# Altium PCB PIC0_D4_SD_card_T3.PcbDoc (part 2 of 2)
Units mm, origin at the board's own origin, x right, y up, seen from the top; angles counter-clockwise.
Board outline 20 x 34 mm, 2 copper layers (Top Layer, Bottom Layer), stack 1.671 mm thick; 52 components, 65 nets, 236 pads, 240 vias.
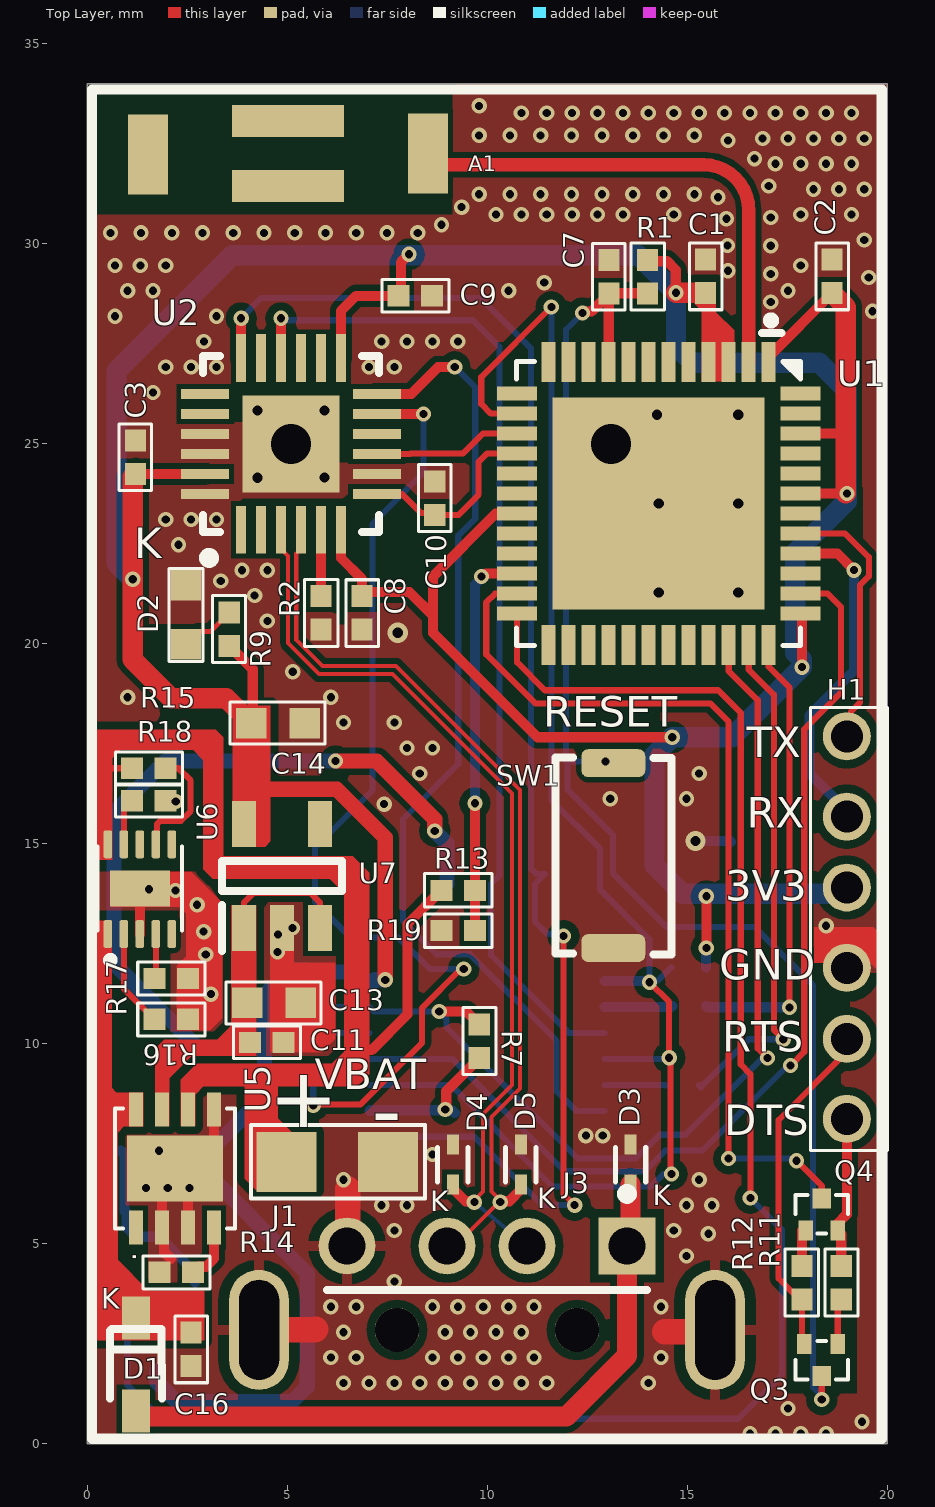
[diagram p0: Top Layer view]

## Via types
v1: diameter 0.381, hole 0.203, Top Layer to Bottom Layer, tented both sides, 227 vias
v2: diameter 0.508, hole 0.254, Top Layer to Bottom Layer, tented both sides, 12 vias
v3: diameter 0.381, hole 0.203, Top Layer to Bottom Layer, 1 vias

## Nets (pads, with @x,y where several pads share a name; then routed paths per layer and width w, separated by ;. In a path a pad name is that pad's centre, name@x,y a point inside that pad or via, vN(x,y) a via of type N, cw(c..) or ccw(c..) an arc to the next point about the centre after c; other vN are vias at no path point) (continued)
GND: (continued)
  Top Layer w0.635: J3.5 5.708,2.85 5.726,2.868 ; J3.4 6.521,4.971 6.521,6.379 ; 14.436,2.802 15.652,2.802 J3.6
  Bottom Layer w0.254: v2(15.212,15.075) 16.059,15.075 16.075,15.06 16.082,15.066 J2.6@16.1,15.048
  Bottom Layer w0.762: 5.069,24.968 5.1,24.999
  other v1: 16.574,0.253 17.209,0.253 17.844,0.253 18.479,0.253 19.374,0.554 17.527,0.888 6.414,1.523 7.049,1.523 7.684,1.523 8.319,1.523 8.954,1.523 9.589,1.523 10.224,1.523 10.859,1.523 11.494,1.523 14.034,1.523 6.097,2.158 6.732,2.158 8.637,2.158 9.272,2.158 9.907,2.158 10.542,2.158 11.177,2.158 14.352,2.158 6.414,2.793 8.954,2.793 9.589,2.793 10.224,2.793 10.859,2.793 6.097,3.428 6.732,3.428 8.637,3.428 9.272,3.428 9.907,3.428 10.542,3.428 11.177,3.428 14.352,3.428 7.684,4.063 14.987,4.698 15.534,5.255 7.684,5.333 14.669,5.333 7.367,5.968 8.002,5.968 14.987,5.968 15.622,5.968 1.473,6.401 2.019,6.401 2.565,6.401 6.414,6.603 15.304,6.603 8.637,7.238 1.8,7.33 12.471,7.707 12.894,7.707 3.096,11.245 2.969,12.233 4.765,12.301 4.778,12.738 2.916,12.807 5.133,12.898 18.479,12.953 2.753,13.48 2.215,13.835 1.554,13.866 7.428,15.994 13.082,16.128 14.987,16.128 8.319,16.763 15.304,16.763 8.002,17.398 8.637,17.398 6.414,18.033 7.684,18.033 1.017,18.668 6.097,18.668 5.144,19.303 4.509,20.573 4.192,21.208 3.344,21.572 3.874,21.843 4.509,21.843 2.287,22.478 1.969,23.113 2.604,23.113 3.239,23.113 1.652,26.288 1.969,26.923 2.604,26.923 3.239,26.923 7.049,26.923 7.684,26.923 2.922,27.558 7.367,27.558 8.002,27.558 8.637,27.558 9.272,27.558 0.699,28.193 3.239,28.193 19.637,28.316 17.094,28.55 1.017,28.828 1.652,28.828 10.542,28.828 17.527,28.828 11.43,29.032 19.543,29.159 17.094,29.252 16.024,29.329 0.699,29.463 1.334,29.463 1.969,29.463 17.844,29.463 17.094,29.955 16.015,29.964 19.432,30.098 0.584,30.277 1.353,30.277 2.121,30.277 2.889,30.277 3.658,30.277 4.426,30.277 5.194,30.277 5.963,30.277 6.731,30.277 7.499,30.277 8.268,30.277 8.865,30.48 15.983,30.63 17.094,30.658 10.224,30.733 10.859,30.733 11.494,30.733 12.129,30.733 12.764,30.733 13.399,30.733 14.669,30.733 17.844,30.733 19.114,30.733 9.366,30.919 15.773,31.166 9.804,31.242 10.573,31.242 11.341,31.242 12.109,31.242 12.878,31.242 13.646,31.242 14.414,31.242 15.183,31.242 18.162,31.368 18.797,31.368 19.432,31.368 17.043,31.445 17.209,32.003 17.844,32.003 18.479,32.003 19.114,32.003 16.688,32.131 16.027,32.588 16.892,32.638 17.527,32.638 18.162,32.638 18.797,32.638 19.432,32.638 9.804,32.715 10.573,32.715 11.341,32.715 12.109,32.715 12.878,32.715 13.646,32.715 14.414,32.715 15.183,32.715 10.859,33.273 11.494,33.273 12.129,33.273 12.764,33.273 13.399,33.273 14.034,33.273 14.669,33.273 15.304,33.273 15.939,33.273 16.574,33.273 17.209,33.273 17.844,33.273 18.479,33.273 19.114,33.273 9.804,33.452
  other v2: 7.769,20.279 14.293,21.288 16.281,21.288 14.293,23.509 16.281,23.509 4.262,24.155 5.938,24.161 14.249,25.73 16.281,25.73 4.262,25.837 5.938,25.837
IO12: U1.18
IO13: U1.20
IO14: U1.17
IO15: U1.21
IO21: U1.42
IO22: U1.39
IO32: U1.12
IO33: U1.13
IO34: U1.10
IO35: U1.11
IO37: U1.6
IO38: U1.7
LNA_IN: A1.1 U1.2 | length 12.6
  Top Layer w0.33: A1.1 ccw(c8.809,32.258) 8.809,31.979 15.418,31.979 cw(c15.418,30.854) 16.543,30.854 U1.2
NetD1_2: D1.2 D3.1 J3.1 | length 17.2
  Top Layer w0.508: D1.2@1.225,0.683 11.979,0.683 13.5,2.205 J3.1 13.589,5.039 D3.1
NetD2_1: D2.1 R9.2 | length 1.4
  Top Layer w0.127: D2.1 2.786,20.315 3.091,20.315 3.556,20.78 R9.2
NetQ2_2: Q2.2 R10.1 U4.3 | length 4.4
  Bottom Layer w0.254: U4.3 0.935,7.245 0.935,5.827 0.968,5.794 R10.1 0.988,5.794 0.988,5.412 1.221,5.179 1.805,5.179 2.524,4.46 2.697,4.287 Q2.2
NetQ3_1: Q3.1 R11.2 | length 1.2
  Top Layer w0.152: Q3.1 R11.2@18.768,3.616
  Top Layer w0.254: R11.2@18.768,3.616 R11.2
NetQ4_1: Q4.1 R12.2 | length 1
  Top Layer w0.254: R12.2 17.872,5.34 Q4.1
NetR2_1: R2.1 U2.5 | length 1.7
  Top Layer w0.254: R2.1 U2.5
NetR4_1: R4.1 U3.2 | length 1.7
  Bottom Layer w0.254: U3.2 14.615,10.927 R4.1
NetR5_2: R5.2 U3.12 | length 1.6
  Bottom Layer w0.152: R5.2 5.647,10.277 U3.12
NetR6_1: R6.1 U3.5 | length 1.5
  Bottom Layer w0.152: U3.5 14.447,8.977 R6.1
NetR7_2: R7.2 U3.9 | length 3.8
  Top Layer w0.254: v1(8.958,8.359) 8.982,8.383 8.982,8.82 9.804,9.642 R7.2
  Bottom Layer w0.254: U3.9 7.078,8.343 8.915,8.343 8.958,8.3 8.992,8.335 9.13,8.335 9.195,8.27
NetR14_1: R14.1 U5.4 | length 1.4
  Top Layer w0.254: R14.1 2.792,4.431 2.973,4.431 3.174,4.632 U5.4
NetR15_1: R15.1 U6.7 | length 3
  Top Layer w0.152: U6.7@1.721,14.977 1.755,15.01 1.755,15.499 1.832,15.576 2.346,15.576 2.588,15.818 2.588,16.59 2.287,16.891 R15.1
NetR16_2: R16.2 U6.2 | length 2.4
  Top Layer w0.152: U6.2@0.921,12.735 0.921,11.376 1.679,10.617 R16.2
NetR17_1: R17.1 U6.4 | length 1.1
  Top Layer w0.152: R17.1 1.721,11.665 U6.4@1.721,12.735
NetR18_1: R18.1 U6.9 | length 1.2
  Top Layer w0.152: U6.9@0.921,14.977 0.921,15.879 1.12,16.078 R18.1
OUT: C11.2 C13.1 U5.7 U7.1 U7.3 | length 3.4
  Top Layer w0.152: U7.1 3.927,13.538 4.158,13.769 5.588,13.769 5.827,13.531 U7.3
  Top Layer w0.254: 3.988,11.963 4.026,11.925
RTS: H1.2 Q3.2 R12.1 | length 8.7
  Top Layer w0.152: Q3.2 17.872,2.501 R12.1 17.811,3.616 17.291,4.136 17.291,8.098 18.996,9.804 H1.2
RX: U1.28
RXD0: H1.5 U1.40 | length 8.7
  Top Layer w0.254: U1.40 18.762,22.259 v1(19.177,21.844)
  Bottom Layer w0.254: H1.5@19.013,15.534 19.013,15.815 18.059,16.769 18.059,18.212 19.177,19.329 v1(19.177,21.844)
SD_CDZ: U1.15 U2.9 | length 3.7
  Top Layer w0.152: U2.9 8.087,24.749 ; 8.087,24.756 9.393,24.756 9.897,25.259 U1.15
SD_Power: Q2.1 U1.24 | length 44.1
  Top Layer w0.152: U1.24 10.753,19.539 11.449,18.842 15.778,18.842 16.344,18.276 16.344,9.487 16.583,9.247 v1(16.583,6.148)
  Bottom Layer w0.152: Q2.1 0.797,3.787 1.005,3.578 1.005,1.477 1.852,0.63 16.281,0.63 17.372,1.721 17.372,5.359 v1(16.583,6.148)
SD_Reset: C10.2 U1.16 U2.7 | length 4.8
  Top Layer w0.152: U2.7 7.874,23.749 8.352,23.271 C10.2@8.695,23.271 ; C10.2 9.283,23.222 9.792,23.731 9.792,24.552 9.999,24.759 U1.16
SD_VDD33: C4.1 J2.4 U4.5 | length 17.6
  Top Layer w0.381: v1(6.21,17.071) 7.242,17.071 8.692,15.621 v1(8.692,15.323)
  Bottom Layer w0.381: U4.5 0.672,12.007 0.672,15.786 1.957,17.071 v1(6.21,17.071) ; v1(8.692,15.323) 9,15.016 J2.4
Select: R8.2 U1.14 U3.1 U3.4 U3.10 | length 39.2
  Top Layer w0.152: U1.14 10.098,25.759 9.855,26.002 9.855,26.67 v1(11.608,28.423) ; v1(14.06,11.543) 14.554,11.049 v1(14.554,9.655) 14.584,9.626 14.584,6.775 v1(14.613,6.746)
  Bottom Layer w0.152: U3.10 9.093,8.977 11.634,6.436 14.096,6.436 14.407,6.746 v1(14.613,6.746) ; v1(11.608,28.423) 11.608,16.095 12.828,14.875 12.828,13.853 14.06,12.621 v1(14.06,11.543) 14.104,11.587 14.276,11.587 14.601,11.912 R8.2@14.611,11.912 ; U3.4 14.526,9.627 v1(14.554,9.655)
  Bottom Layer w0.254: U3.1 v1@14.027,11.577
SENSOR_VN: U1.8
SENSOR_VP: U1.5
TX: U1.29
TXD0: H1.6 U1.41 | length 6.6
  Top Layer w0.152: U1.41 18.954,22.759 19.545,22.168 19.545,21.691 19.33,21.476 19.33,18.539 19.101,18.31 H1.6@19.101,17.738
USB_N: D4.1 J3.2 U2.3 | length 23.2
  Top Layer w0.101: U2.3 4.85,22.38 5.029,22.201 5.029,20.018 5.798,19.249 7.641,19.249 10.625,16.265 10.625,8.968 9.9,8.243 9.9,6.307 9.684,6.09 v1(9.684,6.044)
  Top Layer w0.254: D4.1 9.144,6.385 9.461,6.068 9.662,6.068 v1@9.684,6.09
  Bottom Layer w0.101: v1(9.684,6.044) J3.2
USB_P: D5.1 J3.3 U2.4 | length 22.7
  Top Layer w0.101: U2.4@5.354,22.379 5.349,22.379 5.276,22.305 5.276,22.301 5.231,22.256 5.231,20.102 5.882,19.451 7.725,19.451 10.828,16.349 10.828,8.884 10.115,8.172 10.115,6.307 10.332,6.09 v1(10.332,6.044) 10.294,6.044 9.2,4.95 J3.3
  Top Layer w0.254: v1@10.332,6.09 10.353,6.068 10.554,6.068 10.871,6.385 D5.1@10.871,6.485
VBAT: J1.1 R13.1 R15.2 U5.6 U6.10 | length 5.8
  Top Layer w0.152: 0.432,16.84 0.483,16.891 R15.2
  Top Layer w0.254: 6.759,9.845 7.117,9.845 8.012,10.74 8.012,12.997 8.853,13.839 R13.1
VDD33: C1.1 C2.1 C3.2 C8.2 C9.2 C14.1 H1.4 Q2.3 R1.1 R3.1 R8.1 R9.1 U1.1 U1.3 U1.4 U1.19 U1.37 U1.43 U1.46 U2.6 U2.13 U2.23 U3.14 U4.1 U7.5 | length 121.3
  Top Layer w0.254: C3.2@1.216,24.249 U2.23 ; R9.1 4.143,19.365 4.143,18.051 C14.1 ; U2.6 6.35,22.149 6.872,21.627 6.872,21.3 8.055,21.3 8.654,20.701 ; U2.13 6.35,28.326 6.726,28.702 7.701,28.702 7.701,28.777 7.847,28.777 7.847,29.539 v1(8.052,29.743) ; U1.19 10.218,23.259 8.654,21.694 8.654,20.701 ; R1.1 14.051,29.566 14.503,29.566 14.719,29.35 14.719,28.783 v1(14.724,28.778) ; v1(14.631,17.667) 11.261,17.667 8.654,20.275 8.654,20.701 ; v1(15.484,12.395) v1(15.484,13.693) ; U1.1 17.043,27.182 18.626,28.766 C2.1 ; U1.37 17.874,20.718 v1(17.874,19.42) ; U1.43 18.968,23.759 v1(18.999,23.759) ; U1.46 18.956,25.259 18.968,25.248
  Top Layer w0.381: U7.5 U7.5@4.018,15.589 ; U7.5@4.036,15.608 4.036,15.896 4.506,16.366 6.248,16.366 7.455,15.159 v1(7.455,11.602) ; C14.1@4.036,17.944 C14.1
  Top Layer w0.508: C3.2@1.216,24.249 C3.2 1.143,24.176 v1(1.143,21.615) 1.143,19.609 2.108,18.644 3.481,18.644 C14.1 ; v1(14.724,28.778) 15.459,28.778 C1.1 ; C2.1@18.626,28.766 18.968,28.424 18.968,25.248 v1@18.968,23.759
  Bottom Layer w0.254: U4.1 3.073,7.33 ; R3.1@5.51,11.841 R3.1@5.556,11.796 ; R8.1 15.479,11.917 15.479,12.39 v1(15.484,12.395)
  Bottom Layer w0.381: Q2.3 1.747,1.548 2.236,1.058 5.132,1.058 5.504,1.43 5.504,4.265 2.75,7.019 U4.1 ; 3.073,7.33 4.44,8.697 4.44,11.229 5.052,11.841 R3.1@5.51,11.841 ; R3.1@5.556,11.796 6.705,11.796 6.924,11.577 U3.14 7.122,11.516 7.208,11.602 v1(7.455,11.602) ; v1@8.042,29.718 8.052,29.728 v1(8.052,29.743)
  Bottom Layer w0.508: v1(1.143,21.615) 0.737,22.022 0.737,26.822 3.632,29.718 8.042,29.718 13.785,29.718 v1(14.724,28.778) 14.724,27.44 15.138,27.026 18.312,27.026 18.999,26.339 v1(18.999,23.759) 18.999,23.569 17.704,22.274 17.704,19.779 17.874,19.609 v1(17.874,19.42) 16.122,17.667 v1(14.631,17.667) 14.189,17.226 14.189,14.456 14.892,13.753 18.84,13.753 H1.4
pads on no net: A1.2 A1.3 A1.4 J2.1 J2.8 J2.9 J3. U1.26 U1.44 U1.45 U1.47 U1.48 U2.1 U2.2 U2.10 U2.14 U2.15 U2.17 U2.19 U2.20 U4.4 U5.1 U6.5 U6.6 U6.8 U7.4

## Polygon pours and split planes (outlines as drawn)
GND on Bottom Layer "Bottom Layer-GND" (solid, pour order 6): 20,0 20,34 0,34 0,0
GND on Top Layer "Top Layer-GND" (solid, pour order 4): 0,0 0,34 20,34 20,0

## Other copper
Top Layer:
  pour cut-out: 0,34 9,34 cw(c9,33.856) 9.144,33.856 9.144,30.734 0,30.734
  pour cut-out: 0,14.3 0.092,14.3 0.092,13.341 0,13.341
  pour cut-out: 8.518,26.259 8.899,26.639 9.609,26.639 9.908,26.34 9.908,25.619 9.278,24.989 8.087,24.989 8.087,25.349 7.971,25.464
  pour cut-out: 8.939,21.576 8.939,20.475 9.691,19.723 9.763,19.794 9.763,21.275
  pour cut-out: 3.688,26.407 6.523,26.407 6.523,25.543 3.694,25.542
  pour cut-out: 3.894,23.64 6.46,23.64 6.46,22.919 3.9,22.919
  pour cut-out: 6.523,25.543 6.291,25.543 6.291,24.525 6.513,24.525
  pour cut-out: 6.602,23.497 8.303,23.497 8.303,21.563 7.135,21.563 7.135,21.736 6.635,21.736 6.635,22.267
  pour cut-out: 6.242,20.483 6.48,20.483 6.48,20.792 6.434,20.746 6.242,20.746
  pour cut-out: 18.855,9.333 18.855,8.698 18.183,8.698 18.183,8.626
  pour cut-out: 14.348,17.952 14.348,18.279 11.379,18.279 11.379,17.952
  pour cut-out: 1.961,20.505 1.557,20.505 1.557,19.557 1.961,19.557
  region net GND: 18.175,12.03 19.587,12.03 19.841,11.776 19.841,12.728 19.656,12.913 18.175,12.913
  pour cut-out: 1.815,18.351 1.937,18.229 2.108,18.229 1.941,18.062 1.819,18.062
  pour cut-out: 1.541,4.028 1.526,4.028 1.526,4.857 0.971,4.857 0.971,4.686
  pour cut-out: 2.091,11.009 2.091,11.238 1.954,11.238 1.954,11.009
  pour cut-out: 2.091,12.025 2.091,12.254 1.954,12.254 1.954,12.025
  pour cut-out: 0,13.341 2.305,13.341 2.305,13.056 0,13.056
  pour cut-out: 0,14.3 2.718,14.3 2.718,14.834 0,14.834
  pour cut-out: 3.395,13.462 3.395,13.936 3.065,13.936
  region net VDD33: 16.18,26.568 15.367,26.568 15.367,28.321 15.189,28.499 15.189,29.007 15.215,29.032 15.723,29.032 15.723,28.296 16.18,27.838
  region net VBAT: 3.942,6.629 4.242,6.33 5.707,6.33 5.723,6.345 5.723,7.78 5.136,7.78 4.773,8.143 4.773,8.941 6.756,8.941 7.061,9.246 7.061,14.275 6.64,14.696 3.404,14.696 3.404,17.671 3.223,17.856 0.163,17.856 0.051,17.744 0.051,14.834 0.279,14.605 0.635,14.605 0.635,17.145 0.838,17.348 2.652,17.348 2.906,17.094 2.906,14.366 3.145,14.127 4.486,14.127 6.066,14.127 6.426,13.767 6.426,9.804 6.121,9.5 2.748,9.5 2.349,9.101 2.349,7.95 2.7,7.95 2.7,8.735 2.906,8.941 3.942,8.941
  region net VDD33: 3.642,14.933 4.458,14.933 4.587,15.062 4.587,18.458 3.724,18.458 3.64,18.374
  region: 3.731,14.915
  region net GND: 0.589,14.3 2.609,14.3 3.376,13.533 3.376,10.64 3.084,10.348 2.245,10.348 2.245,11.958 2.484,12.197 2.484,13.249 2.301,13.432 0.589,13.432
  region net GND: 5.867,9.787 6.205,10.124 6.205,12.032 5.169,12.032 5.169,13.467 4.58,13.467 4.58,9.787
  region net OUT: 1.702,7.95 2.057,7.95 2.057,9.144 2.616,9.703 4.229,9.703 4.229,13.462 3.602,13.462 3.602,10.452 3.259,10.109 1.933,10.109 1.702,9.878
  region: 3.658,13.437
  region net EXT_5V: 0.064,2.587 2.927,2.587 2.927,3.829 1.536,3.829 0.764,4.6 0.764,7.782 0.92,7.938 1.4,7.938 1.4,8.786 0.732,8.786 0.616,8.902 0.616,13.081 0.064,13.081 0.064,8.708
  pour cut-out: 10.253,19.47 18.308,19.469 18.308,27.551 10.253,27.551
  pour cut-out: 19.405,23.927 19.405,22.418 18.97,22.418 18.97,23.954
  pour cut-out: 17.48,6.486 17.48,1.252 19.254,1.252 19.254,6.487
Bottom Layer:
  pour cut-out: 0,34 9,34 cw(c9,33.856) 9.144,33.856 9.144,30.734 0,30.734
  pour cut-out: 8.377,14.793 8.377,13.074 9.623,13.074 9.623,14.928
  pour cut-out: 13.802,10.642 13.802,9.358 17.188,9.358 17.188,10.595
  pour cut-out: 15.914,12.689 15.914,11.217 17.545,11.217 17.545,11.747
  pour cut-out: 11.823,24.68 12.016,24.68 12.016,22.421 11.796,22.421
  pour cut-out: 5.129,8.911 4.8,8.911 4.8,9.622 5.129,9.622
  region net GND: 18.175,12.03 19.587,12.03 19.841,11.776 19.841,12.728 19.656,12.913 18.175,12.913
  region net GND: 16.716,20.554
  pour cut-out: 6.482,14.933 6.053,14.933 6.053,13.12 6.482,13.12
  pour cut-out: 7.641,14.928 7.211,14.928 7.211,12.891 7.641,12.891
  pour cut-out: 14.464,3.986 14.464,6.02 8.28,5.969 8.23,3.988

## Silkscreen, mask and mechanical layers (free items; w line width, h text height)
Top Overlay:
  lines w0.127: 17.403,27.059 17.843,26.619
  lines w0.203: 16.876,27.773 17.367,27.773 ; 17.647,26.994 17.798,26.833
  lines w0.254: 0.125,0.129 0.125,33.858 19.869,33.858 19.869,0.129 0.125,0.129
  text "K" at 1.186,22.147 h0.76
  text "RESET" at 11.405,17.932 h0.76
  text "TX" at 16.49,17.172 h0.76
  text "RX" at 16.49,15.403 h0.76
  text "3V3" at 15.96,13.576 h0.76
  text "GND" at 15.812,11.601 h0.76
  text "RTS" at 15.875,9.804 h0.76
  text "VBAT" at 5.689,8.863 h0.76
  text "+" at 4.545,7.92 h1.52
  text "DTS" at 15.926,7.722 h0.76
  text "-" at 7.115,7.605 h1.52
  text "K" at 0.356,3.378 h0.51
Bottom Overlay:
  text "TX" at 17.956,17.551 h0.76
  text "RX" at 17.937,15.957 h0.64
  text "3V3" at 17.929,13.232 h0.64
  text "GND" at 18.136,11.737 h0.64
  text "RTS" at 17.542,8.906 h0.64 r270
  text "DTS" at 17.966,7.625 h0.64
Mechanical 2:
  the board outline again, w0.1

## Dimensions
0,0 to 20,0 on Mechanical 2
0,0 to 20,34 on Mechanical 2

## Text inside footprints (layer, text, board x,y; h text height)
D3: Top Overlay "K" at 14.148,5.969 h0.51
D4: Top Overlay "K" at 8.585,5.817 h0.51
D5: Top Overlay "K" at 11.252,5.893 h0.51